# Altium PCB Analog-Multiplier.PcbDoc
Units mil, origin at the board's own origin, x right, y up, seen from the top; angles counter-clockwise.
Board outline 3270 x 2300 mil, 2 copper layers (Top Layer, Bottom Layer); 43 components, 22 nets, 119 pads, 504 vias.
Unrouted connection lines stored in the file: 46.
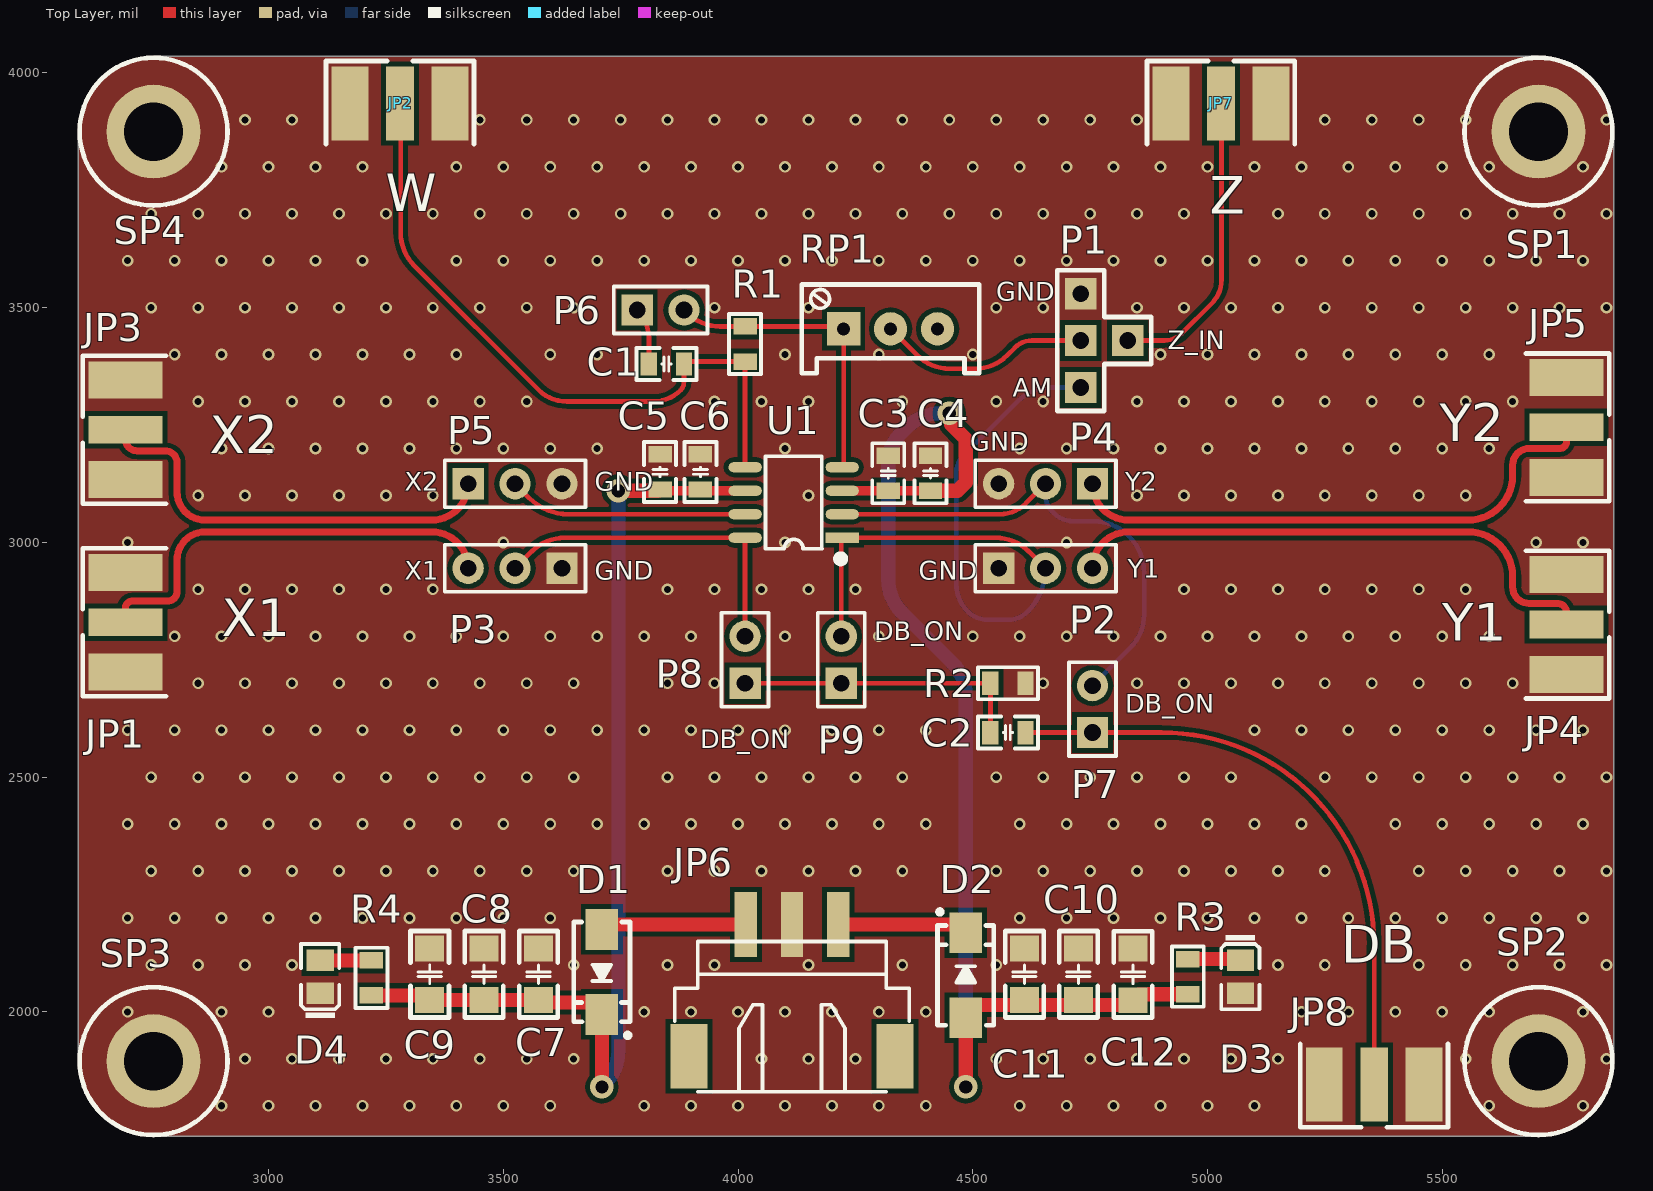
[diagram p0: Top Layer view]
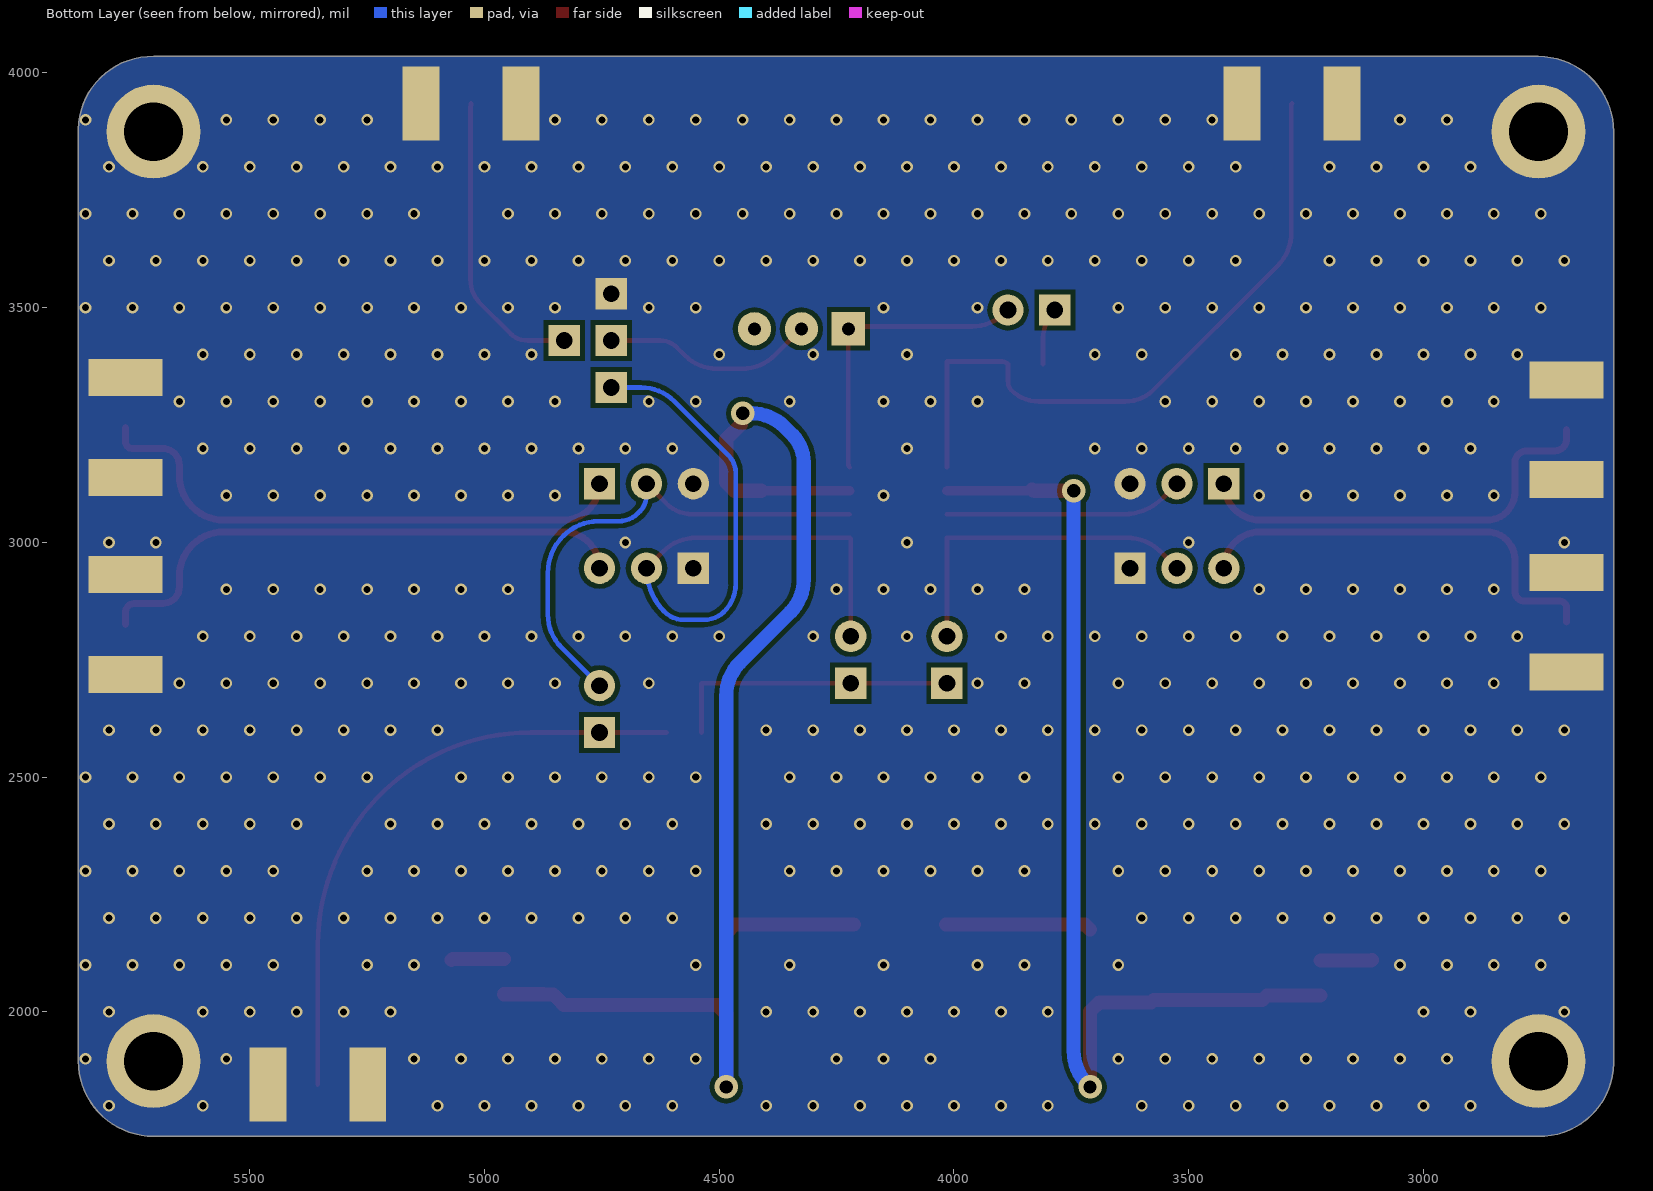
[diagram p1: Bottom Layer view, seen from below]

## Layer stack, top to bottom
Top Solder: solder mask 0.4, Solder Resist, Dk 3.5
Top Layer: signal copper 1.4
Dielectric1: dielectric 12.6, FR-4, Dk 4.8
Bottom Layer: signal copper 1.4
Bottom Solder: solder mask 0.4, Solder Resist, Dk 3.5

## Board outline
2595,1890 2595,3875 cw(c2755,3875) 2755,4035 5705,4035 cw(c5707.5,3877.5) 5865,3880 5865,1895 cw(c5705,1895) 5705,1735 2755,1735 cw(c2752.5,1892.5)

## Design rules (kind name [scope] priority, off if disabled: settings)
Clearance [All] p1: gap=10 ignorepadtopadclearanceinfootprint=FALSE except(0: Arc-Hole Track-Hole SMDPad-Hole THPad-Hole Via-Hole Fill-Hole Poly-Hole Region-Hole Text-Hole)
DiffPairsRouting [All] p1: maxlimit=10 minlimit=10 mostfreqgap=10 toplayer_minwidth=15 toplayer_maxwidth=15 toplayer_prefwidth=15 bottomlayer_minwidth=15 bottomlayer_maxwidth=15 bottomlayer_prefwidth=15 maxuncoupledlength=500
PolygonConnect [All] p1: connectstyle=Direct reliefconductorwidth=10 reliefentries=4 polygonreliefangle="90 Angle" airgapwidth=10
RoutingVias [All] p1: holewidth=28 width=50 viastyle="Through Hole" minholewidth=28 minwidth=50 maxholewidth=28 maxwidth=50
SolderMaskExpansion [All] p1: expansion=4 istentingtop=FALSE
Width [All] p1: maxlimit=30 minlimit=10 preferedwidth=10 minimp=50.000000 maximp=50.000000 favimp=50.000000
29 further rules are at their usual default settings.

## Classes and differential pairs
differential pair Y: +Y_P -Y_N
differential pair X: +X_P -X_N

## Components (designator, comment, footprint, x,y, rotation, side; value= is the part's Value field where it differs from the comment)
C1 "104" "C 0805_L" 3847.6,3380 r0 top
C2 "104" "C 0805_L" 4575,2595 r0 top
C3 "104" "C 0805_L" 4320,3147.4 r270 top
C4 "104" "C 0805_L" 4410,3147.4 r270 top
C5 "104" "C 0805_L" 3833.99,3150 r270 top
C6 "104" "C 0805_L" 3920,3150 r270 top
C7 "104" "C 1206_L" 3575.06,2080.11 r270 top
C8 "104" "C 1206_L" 3459.13,2080.11 r270 top
C9 "104" "C 1206_L" 3343.19,2080.11 r270 top
C10 "104" "C 1206_L" 4725,2080.11 r270 top
C11 "104" "C 1206_L" 4610,2080.11 r270 top
C12 "104" "C 1206_L" 4841.19,2080 r270 top
D1 "1N4007" SMA 3710,2085 r270 top
D2 "1N4007" SMA 4485,2077.86 r90 top
D3 "蓝灯 0805" 0805_LED_S1 5070,2075 r270 top
D4 "蓝灯 0805" 0805_LED_S1 3110,2075.04 r90 top
JP1 "SMA WIFI 天线接口" SMA-KE 2695,2830 r90 top
JP2 "SMA WIFI 天线接口" SMA-KE 3280,3935 r0 top
JP3 "SMA WIFI 天线接口" SMA-KE 2695,3240 r90 top
JP4 "SMA WIFI 天线接口" SMA-KE 5765,2825 r270 top
JP5 "SMA WIFI 天线接口" SMA-KE 5765,3245 r270 top
JP6 "HDR-1X3" XH2.54-WS-3P 4115,1990 r0 top
JP7 "SMA WIFI 天线接口" SMA-KE 5028.7,3935 r0 top
JP8 "SMA WIFI 天线接口" SMA-KE 5355,1845 r180 top
P1 "Header 4" Cross4 4730,3430 r90 top
P2 "Header 3" HDR2.54-LI-3P 4655,2945 r0 top
P3 "Header 3" HDR2.54-LI-3P 3525,2945 r180 top
P4 "Header 3" HDR2.54-LI-3P 4655,3125 r180 top
P5 "Header 3" HDR2.54-LI-3P 3525,3125 r0 top
P6 "Header 2" HDR2.54-LI-2P 3835,3495 r0 top
P7 "Header 2" HDR2.54-LI-2P 4755,2645 r90 top
P8 "Header 2" HDR2.54-LI-2P 4015,2750 r90 top
P9 "Header 2" HDR2.54-LI-2P 4220,2750 r90 top
R1 "1K" "R 0805_L" 4015,3422.6 r270 top
R2 "1K" "R 0805_L" 4575,2700 r180 top
R3 "1K" "R 0805_L" 4958.25,2075 r270 top
R4 "1K" "R 0805_L" 3219.25,2072.4 r270 top
RP1 "10K" 3296W 4325,3455 r0 top
SP1 "M3铜柱" M3x4_L 5705,3875 r0 top
SP2 "M3铜柱" M3x4_L 5705,1895 r0 top
SP3 "M3铜柱" M3x4_L 2755,1895 r0 top
SP4 "M3铜柱" M3x4_L 2755,3875 r0 top
U1 "AD835" SOP8_N 4118.63,3085 r180 top

## Footprints (in the part's own frame and the unit in brackets; to place one, negate y for a bottom-side part, rotate by r counter-clockwise, add the part's x,y. Pads: shape width x height; smd on the part's side, far side on the other; paste and mask are expansions set on the pad)
0805_LED_S1 [mm]
  rect 1.16x1.47 smd: A(0.89,0) K(-0.89,0)
  silkscreen extent -2.25,-1.04 1.77,1.03, body extent -1.01,-0.62 1.01,0.62, height 1.1
3296W [mm] "Precise Multi-Winding Adjustable Resistor"
  rect 1.8x1.8 hole 0.7: 1(-2.54,0)
  round 1.8 hole 0.7: 2(0,0) 3(2.54,0)
  silkscreen extent -4.8,-2.4 4.8,2.4, body extent -4.75,-2.4 4.75,2.4, height 11.52
"C 0805_L" [mil] "无极性贴片电容"
  rect 35x50 smd: 1(-37.4,0) 2(37.4,0)
  silkscreen extent -64,-34 64,34, body extent -39,-24 39,24, height 20
"C 1206_L" [mil] "无极性贴片电容"
  rect 55x62 smd: 1(-55.12,0) 2(55.11,0)
  silkscreen extent -92,-41 92,41, body extent -63,-32 63,32, height 48
Cross4 [mm] "排针，1脚"
  rect 1.7x1.7 hole 0.9: 1(-2.54,0) 2(0,-2.54) 3(2.54,0) 4(0,0)
  silkscreen extent -3.81,-3.81 3.81,1.27, body extent -3.81,-3.81 3.81,1.27, height 8.5
HDR2.54-LI-2P [mm] "排针，2脚"
  rect 1.7x1.7 hole 0.9: 1(-1.27,0)
  round 1.7 hole 0.9: 2(1.27,0)
  silkscreen extent -2.54,-1.27 2.54,1.27, body extent -2.54,-1.27 2.54,1.27, height 8.5
HDR2.54-LI-3P [mm] "排针，3脚"
  rect 1.7x1.7 hole 0.9: 1(-2.54,0)
  round 1.7 hole 0.9: 2(0,0) 3(2.54,0)
  silkscreen extent -3.81,-1.27 3.81,1.27, body extent -3.81,-1.27 3.81,1.27, height 8.5
M3x4_L [mil] "M3铜柱，长：4mm"
  round 200 hole 125: 1(0,0)
  silkscreen extent -157,-157 157,157, body extent -106,-93 106,93, height 159
"R 0805_L" [mil] "1/8W贴片电阻"
  rect 35x50 smd: 1(-37.4,0) 2(37.4,0)
  silkscreen extent -64,-34 64,34, body extent -39,-25 39,25, height 20
SMA [mm] "4.5x2.6*2.2mm（长宽高，不包括引脚）"
  rect 2.2x1.75 smd: 1(-2.3,0) 2(2.3,0)
  silkscreen extent -2.7,-1.52 3.56,1.52, body extent -2.53,-1.3 2.58,1.3, height 2.15
SMA-KE [mm] "SMA 偏脚射频天线座     淘宝ID:黄晶宝石"
  rect 1.5x4 smd: 1(0,0)
  rect 2x4 smd: 2(-2.7,0) 2(2.7,0)
  rect 2x4 smd far side: 3(-2.7,0) 3(2.7,0)
  silkscreen extent -4,-2.2 4,2.3, body extent -3.25,-1.3 3.25,12.2, height 3.75
SOP8_N [mm] "5*6*1.8mm（长宽高）"
  rect 1.8x0.55 smd: 1(-2.625,1.905)
  oval 1.8x0.55 smd: 2(-2.625,0.635) 3(-2.625,-0.635) 4(-2.625,-1.905) 5(2.625,-1.905) 6(2.625,-0.635) 7(2.625,0.635) 8(2.625,1.905)
  silkscreen extent -2.69,-2.5 1.52,3.2, body extent -3,-2.5 3,2.5, height 1.9
XH2.54-WS-3P [mm] "长：12.5mm，宽：8mm，高：6.1mm"
  rect 2x3.5 smd: 0(-5.577,-2.15) 0(5.577,-2.15)
  rect 1.2x3.5 smd: 1(-2.5,4.981) 2(0,4.981) 3(2.5,4.981)
  silkscreen extent -6.35,-4.06 6.35,4.06, body extent -6.25,-4 6.25,6.42, height 6.05

## Part data
C1 C2 C3 C4 C5 C6 C7 C8 C9 C10 C11 C12: library part C, "无极性贴片电容", BOM名称=无极性贴片电容, 材质=X7R
D1 D2: "整流二极管", BOM名称=整流二极管
D3 D4: library part "0805 蓝灯", "发光二极管", Package=0805, SuppliersPartNumber=C2293, ComponentLink1Description=供应商链接, ComponentLink1URL=http://www.szlcsc.com/product/details_2666.html, Supplier=LC
JP1 JP2 JP3 JP4 JP5 JP7 JP8: library part SMA, "SMA-2.4G射频天线接口", BOM名称=SMA-2.4G射频天线接口
JP6: library part "Header 3", "3P接插件", BOM名称=3P接插件
P1: "Header, 4-Pin", LatestRevisionDate=17-Jul-2002, LatestRevisionNote="Re-released for DXP Platform.", Publisher="Altium Limited"
P2 P3 P4 P5: "Header, 3-Pin", LatestRevisionDate=17-Jul-2002, LatestRevisionNote="Re-released for DXP Platform.", Publisher="Altium Limited"
P6 P7 P8 P9: "Header, 2-Pin", LatestRevisionDate=17-Jul-2002, LatestRevisionNote="Re-released for DXP Platform.", Publisher="Altium Limited"
R1 R2 R3 R4: library part R, "贴片电阻", BOM名称=贴片电阻
RP1: library part RP-SMD, "贴片电位器", BOM名称=贴片电位器
SP1 SP2 SP3 SP4: library part 铜柱小焊盘, "铜柱", BOM名称=铜柱

## Via types
v1: diameter 25, hole 15, Top Layer to Bottom Layer, tented both sides, 500 vias
v2: diameter 50, hole 28, Top Layer to Bottom Layer, tented both sides, 4 vias

## Nets (pads, with @x,y where several pads share a name; then routed paths per layer and width w, separated by ;. In a path a pad name is that pad's centre, name@x,y a point inside that pad or via, vN(x,y) a via of type N, cw(c..) or ccw(c..) an arc to the next point about the centre after c; other vN are vias at no path point)
+5: C5.2 C6.2 C7.2 C8.2 C9.2 D1.2 R4.2 U1.6 | length 2217.4
  Top Layer w20: C5.2 ccw(c3840.27,3118.88) 3840.27,3110 3920,3110 U1.6
  Top Layer w30: R4.2 3333.19,2035 C9.2 C8.2 C7.2 3580.06,2020 3690.55,2020 3710,2000.55 D1.2 v2(3710,1840) ; v2(3745,3110) 3827.71,3110 ccw(c3827.71,3118.88) C5.2
  Bottom Layer w30: v2(3710,1840) 3715.71,1845.71 ccw(c3645,1916.42) 3745,1916.42 v2(3745,3110)
-5: C3.2 C4.2 C10.2 C11.2 C12.2 D2.1 R3.2 U1.3 | length 2654.2
  Top Layer w20: U1.3 C3.2 C4.2
  Top Layer w30: C4.2 4467.43,3110 4485,3127.57 4485,3220 4453.83,3251.17 4453.83,3271.17 v2(4450,3275) ; v2(4485,1840) D2.1 4485,1995.55 4504.45,2015 4831.3,2015 C12.2 4853.69,2037.39 4874.54,2037.39 4874.76,2037.6 R3.2
  Bottom Layer w30: v2(4450,3275) 4431.42,3275 ccw(c4431.42,3175) 4360.71,3245.71 4345,3230 ccw(c4405.36,3169.64) 4320,3169.64 4320,2921.42 ccw(c4420,2921.42) 4349.29,2850.71 4455.71,2744.29 cw(c4385,2673.58) 4485,2673.58 v2(4485,1840)
DOUBLE: C2.2 JP8.1 P7.1 | length 1298.2
  Top Layer w10: C2.2 P7.1 4902.14,2595 cw(c4902.14,2142.14) 5355,2142.14 JP8.1
GND: C3.1 C4.1 C5.1 C6.1 C7.1 C8.1 C9.1 C10.1 C11.1 C12.1 D3.A D4.K JP1.2 JP1.3 JP2.2 JP2.3 JP3.2 JP3.3 JP4.2 JP4.3 JP5.2 JP5.3 JP6.2 JP7.2 JP7.3 JP8.2 JP8.3 P1.3 P2.1 P3.1 P4.3 P5.3 R2.1 SP1.1 SP2.1 SP3.1 SP4.1
  other v1: 2900,1800 3000,1800 3100,1800 3200,1800 3300,1800 3400,1800 3500,1800 3600,1800 3800,1800 3900,1800 4000,1800 4100,1800 4200,1800 4300,1800 4400,1800 4600,1800 4700,1800 4800,1800 4900,1800 5000,1800 5100,1800 5600,1800 5800,1800 2950,1900 3050,1900 3150,1900 3250,1900 3350,1900 3450,1900 3550,1900 3650,1900 4050,1900 4150,1900 4250,1900 4550,1900 4650,1900 4750,1900 4850,1900 4950,1900 5050,1900 5150,1900 5550,1900 5850,1900 2700,2000 2900,2000 3000,2000 3800,2000 3900,2000 4000,2000 4100,2000 4200,2000 4300,2000 4400,2000 5200,2000 5300,2000 5400,2000 5500,2000 5600,2000 5800,2000 2750,2100 2850,2100 2950,2100 3050,2100 3650,2100 3850,2100 3950,2100 4150,2100 4350,2100 4550,2100 5150,2100 5250,2100 5450,2100 5550,2100 5650,2100 5750,2100 5850,2100 2700,2200 2800,2200 2900,2200 3000,2200 3100,2200 3200,2200 3300,2200 3400,2200 3500,2200 3600,2200 4600,2200 4700,2200 4800,2200 4900,2200 5000,2200 5100,2200 5200,2200 5300,2200 5400,2200 5500,2200 5600,2200 5700,2200 5800,2200 2750,2300 2850,2300 2950,2300 3050,2300 3150,2300 3250,2300 3350,2300 3450,2300 3550,2300 3650,2300 3850,2300 3950,2300 4050,2300 4150,2300 4250,2300 4350,2300 4550,2300 4650,2300 4750,2300 4850,2300 4950,2300 5050,2300 5150,2300 5250,2300 5450,2300 5550,2300 5650,2300 5750,2300 5850,2300 2700,2400 2800,2400 2900,2400 3000,2400 3100,2400 3200,2400 3300,2400 3400,2400 3500,2400 3600,2400 3700,2400 3800,2400 3900,2400 4000,2400 4100,2400 4200,2400 4300,2400 4400,2400 4600,2400 4700,2400 4800,2400 4900,2400 5000,2400 5100,2400 5200,2400 5400,2400 5500,2400 5600,2400 5700,2400 5800,2400 2750,2500 2850,2500 2950,2500 3050,2500 3150,2500 3250,2500 3350,2500 3450,2500 3550,2500 3650,2500 3850,2500 3950,2500 4050,2500 4150,2500 4250,2500 4350,2500 4550,2500 4650,2500 4750,2500 4850,2500 4950,2500 5050,2500 5250,2500 5350,2500 5450,2500 5550,2500 5650,2500 5750,2500 5850,2500 2700,2600 2800,2600 2900,2600 3000,2600 3100,2600 3200,2600 3300,2600 3400,2600 3500,2600 3600,2600 3700,2600 3800,2600 3900,2600 4000,2600 4100,2600 4200,2600 4300,2600 4400,2600 5100,2600 5200,2600 5300,2600 5400,2600 5500,2600 5600,2600 5700,2600 5800,2600 2850,2700 2950,2700 3050,2700 3150,2700 3250,2700 3350,2700 3450,2700 3550,2700 3650,2700 3850,2700 3950,2700 4650,2700 4850,2700 4950,2700 5050,2700 5150,2700 5250,2700 5350,2700 5450,2700 5550,2700 5650,2700 2800,2800 2900,2800 3000,2800 3100,2800 3200,2800 3300,2800 3400,2800 3500,2800 3600,2800 3700,2800 3800,2800 3900,2800 4100,2800 4300,2800 4500,2800 4600,2800 4700,2800 4800,2800 4900,2800 5000,2800 5100,2800 5200,2800 5300,2800 5400,2800 5500,2800 5600,2800 2850,2900 2950,2900 3050,2900 3150,2900 3250,2900 3350,2900 3850,2900 3950,2900 4050,2900 4150,2900 4250,2900 4950,2900 5050,2900 5150,2900 5250,2900 5350,2900 5450,2900 5550,2900 2700,3000 3500,3000 4100,3000 4700,3000 5700,3000 5800,3000 2850,3100 2950,3100 3050,3100 3150,3100 3250,3100 3350,3100 4150,3100 4850,3100 4950,3100 5050,3100 5150,3100 5250,3100 5350,3100 5450,3100 5550,3100 2900,3200 3000,3200 3100,3200 3200,3200 3300,3200 3400,3200 3500,3200 3600,3200 3700,3200 4100,3200 4600,3200 4700,3200 4800,3200 4900,3200 5000,3200 5100,3200 5200,3200 5300,3200 5400,3200 5500,3200 5600,3200 2850,3300 2950,3300 3050,3300 3150,3300 3250,3300 3350,3300 3450,3300 3550,3300 3950,3300 4050,3300 4150,3300 4350,3300 4550,3300 4650,3300 4850,3300 4950,3300 5050,3300 5150,3300 5250,3300 5350,3300 5450,3300 5550,3300 5650,3300 2800,3400 2900,3400 3000,3400 3100,3400 3200,3400 3300,3400 3400,3400 3600,3400 3700,3400 4100,3400 4300,3400 4500,3400 4900,3400 5000,3400 5100,3400 5200,3400 5300,3400 5400,3400 5500,3400 5600,3400 2750,3500 2850,3500 2950,3500 3050,3500 3150,3500 3250,3500 3350,3500 3450,3500 3550,3500 3650,3500 3950,3500 4150,3500 4550,3500 4650,3500 4850,3500 4950,3500 5050,3500 5150,3500 5250,3500 5350,3500 5450,3500 5550,3500 5650,3500 5750,3500 5850,3500 2700,3600 2800,3600 2900,3600 3000,3600 3100,3600 3200,3600 3400,3600 3500,3600 3600,3600 3700,3600 3800,3600 3900,3600 4000,3600 4100,3600 4200,3600 4300,3600 4400,3600 4500,3600 4600,3600 4700,3600 4800,3600 4900,3600 5000,3600 5100,3600 5200,3600 5300,3600 5400,3600 5500,3600 5600,3600 5700,3600 5800,3600 2750,3700 2850,3700 2950,3700 3050,3700 3150,3700 3250,3700 3350,3700 3450,3700 3550,3700 3650,3700 3750,3700 3850,3700 3950,3700 4050,3700 4150,3700 4250,3700 4350,3700 4450,3700 4550,3700 4650,3700 4750,3700 4850,3700 4950,3700 5150,3700 5250,3700 5350,3700 5450,3700 5550,3700 5650,3700 5750,3700 5850,3700 2900,3800 3000,3800 3100,3800 3200,3800 3400,3800 3500,3800 3600,3800 3700,3800 3800,3800 3900,3800 4000,3800 4100,3800 4200,3800 4300,3800 4400,3800 4500,3800 4600,3800 4700,3800 4800,3800 4900,3800 5000,3800 5100,3800 5200,3800 5300,3800 5400,3800 5500,3800 5600,3800 5800,3800 2950,3900 3050,3900 3450,3900 3550,3900 3650,3900 3750,3900 3850,3900 3950,3900 4050,3900 4150,3900 4250,3900 4350,3900 4450,3900 4550,3900 4650,3900 4750,3900 4850,3900 5250,3900 5350,3900 5450,3900 5550,3900 5850,3900
NetC1_1: C1.1 P6.1 | length 121.7
  Top Layer w10: P6.1 cw(c3724.17,3434.17) 3810.2,3434.17 C1.1
NetC2_1: C2.1 P8.1 P9.1 R2.2 | length 627.6
  Top Layer w10: P8.1 R2.2 C2.1
NetD1_1: D1.1 JP6.1 | length 310.9
  Top Layer w30: D1.1 3720.55,2186.1 JP6.1
NetD2_2: D2.2 JP6.3 | length 278.9
  Top Layer w30: JP6.3 4467.31,2186.1 D2.2
NetD3_K: D3.K R3.1 | length 112.7
  Top Layer w30: R3.1 5067.63,2112.4 D3.K
NetD4_A: D4.A R4.1 | length 109.4
  Top Layer w30: D4.A 3110.28,2109.8 R4.1
NetP1_4: P1.4 RP1.2 | length 454.4
  Top Layer w10: RP1.2 4380.71,3399.29 ccw(c4451.42,3470) 4451.42,3370 4505,3370 ccw(c4505,3466.57) 4573.28,3398.28 4590,3415 cw(c4626.21,3378.79) 4626.21,3430 P1.4
W: C1.2 JP2.1 R1.2 U1.5 | length 1458.2
  Top Layer w10: JP2.1 3281.3,3933.7 3281.3,3660.12 ccw(c3381.3,3660.12) 3310.59,3589.41 3575,3325 ccw(c3635.36,3385.36) 3635.36,3300 3819.56,3300 3819.64,3300 ccw(c3819.64,3381.85) 3877.49,3323.94 ccw(c3859.39,3342.06) 3885,3342.06 C1.2 cw(c3897.55,3367.45) 3897.55,3385.2 R1.2 4015,3160.28 U1.5
X1: P3.2 P8.2 U1.8 | length 723
  Top Layer w10: P3.2 3560.71,2980.71 cw(c3631.42,2910) 3631.42,3010 U1.8 4015,3009.72 P8.2
X2: P5.2 U1.7 | length 512.2
  Top Layer w10: P5.2 3555.71,3094.29 ccw(c3638.49,3177.07) 3638.49,3060 U1.7
X_N: JP3.1 P5.1 | length 919.5
  Top Layer w15: JP3.1 2695,3220 ccw(c2720,3220) 2720,3195 2780,3195 cw(c2780,3170) 2805,3170 2805,3107.5 ccw(c2865,3107.5) 2865,3047.5 3347.5,3047.5 ccw(c3347.5,3125) P5.1
X_P: JP1.1 P3.3 | length 926
  Top Layer w15: JP1.1 2695,2860 cw(c2710,2860) 2710,2875 2785,2875 ccw(c2785,2895) 2805,2895 2805,2962.5 cw(c2865,2962.5) 2865,3022.5 3347.5,3022.5 cw(c3347.5,2945) P3.3
Y1: P1.1 P2.2 P9.2 U1.1 | length 1554.5
  Top Layer w10: P9.2 4220,3005.24 cw(c4226.74,3005.24) U1.1 4548.58,3010 cw(c4548.58,2910) 4619.29,2980.71 P2.2
  Bottom Layer w10: P2.2 cw(c4523.46,2945) 4616.53,2852.04 cw(c4575.46,2893) 4575.46,2835 4574.7,2835 4532.28,2835 4532.21,2835 cw(c4532.25,2895.91) 4489.24,2852.78 cw(c4547.55,2911.21) 4465,2911.21 4465,2911.3 4465,3148.79 cw(c4516.21,3148.79) 4479.99,3184.99 4595.71,3300.71 cw(c4666.42,3230) 4666.42,3330 P1.1
Y2: P4.2 P7.2 U1.2 | length 1072.6
  Top Layer w10: U1.2 4557.07,3060 ccw(c4557.07,3139.5) 4613.28,3083.28 P4.2
  Bottom Layer w10: P4.2@4659.88,3120.12 P4.2 4655,3101.21 ccw(c4706.21,3101.21) 4669.99,3065.01 4672.32,3062.68 ccw(c4715,3105.36) 4715,3045 4756.72,3045 cw(c4756.72,2937.93) 4832.43,3013.64 cw(c4753.79,2935) 4865,2935 4865,2934.91 4865,2846.42 cw(c4765,2846.42) 4835.71,2775.71 P7.2
Y_N: JP5.1 P4.1 | length 1189.5
  Top Layer w15: P4.1 ccw(c4832.5,3125) 4832.5,3047.5 5555,3047.5 ccw(c5555,3142.5) 5650,3142.5 5650,3165 cw(c5685,3165) 5685,3200 5750,3200 ccw(c5750,3215) 5765,3215 JP5.1
Y_P: JP4.1 P2.3 | length 1187.4
  Top Layer w15: P2.3 cw(c4832.5,2945) 4832.5,3022.5 5555,3022.5 cw(c5555,2927.5) 5650,2927.5 5650,2905 ccw(c5685,2905) 5685,2870 5745,2870 cw(c5745,2850) 5765,2850 JP4.1
Z: P6.2 R1.1 RP1.1 U1.4 | length 647.3
  Top Layer w10: P6.2 3890.71,3489.29 ccw(c3961.42,3560) 3961.42,3460 R1.1 4212.93,3460 cw(c4212.93,3442.93) RP1.1 4225,3167.31 cw(c4214.66,3167.31) U1.4
Z_IN: JP7.1 P1.2 | length 641.6
  Top Layer w10: P1.2 4908.74,3430 ; 4908.79,3430 ccw(c4908.79,3481.21) 4945,3445 5008.85,3508.85 ccw(c4957.57,3560) 5030,3560 5030,3928.7 5028.7,3930 JP7.1
pads on no net: JP6.0 RP1.3

## Polygon pours and split planes (outlines as drawn)
GND on Top Layer "GND_L01_P000" (solid, pour order 0): 2595,1890 2595,3875 cw(c2755,3875) 2755,4035 5705,4035 cw(c5707.5,3877.5) 5865,3880 5865,1895 cw(c5705,1895) 5705,1735 2755,1735 cw(c2752.5,1892.5)
GND on Bottom Layer "GND_L02_P001" (solid, pour order 1): 2595,1890 2595,3875 cw(c2755,3875) 2755,4035 5705,4035 cw(c5707.5,3877.5) 5865,3880 5865,1895 cw(c5705,1895) 5705,1735 2755,1735 cw(c2752.5,1892.5)

## Silkscreen, mask and mechanical layers (free items; w line width, h text height)
Top Overlay:
  text "W" at 3250,3705 h80
  text "Z" at 5005,3700 h80
  text "GND" at 4550,3515 h40
  text "Z_IN" at 4915,3411.66 h40
  text "AM" at 4585,3310 h40
  text "Y2" at 5495,3215 h80
  text "GND" at 4495,3195 h40
  text "X2" at 2875,3190 h80
  text "X2" at 3290,3110 h40
  text "GND" at 3695,3110 h40
  text "Y2" at 4825,3110 h40
  text "Y1" at 4830,2925 h40
  text "X1" at 3290,2920 h40
  text "GND" at 3695,2920 h40
  text "GND" at 4385,2920 h40
  text "X1" at 2900,2800 h80
  text "DB_ON" at 4290,2791.66 h40
  text "Y1" at 5500,2790 h80
  text "DB_ON" at 4825,2636.66 h40
  text "DB_ON" at 3920,2561.66 h40
  text "DB" at 5285,2105 h80
Mechanical 1:
  the board outline again, w7.87